# Altium PCB logi-cam.PcbDoc
Units mil, origin at the board's own origin, x right, y up, seen from the top; angles counter-clockwise.
Board outline 1771 x 996 mil, 2 copper layers (Top Layer, Bottom Layer); 37 components, 25 nets, 168 pads, 79 vias.
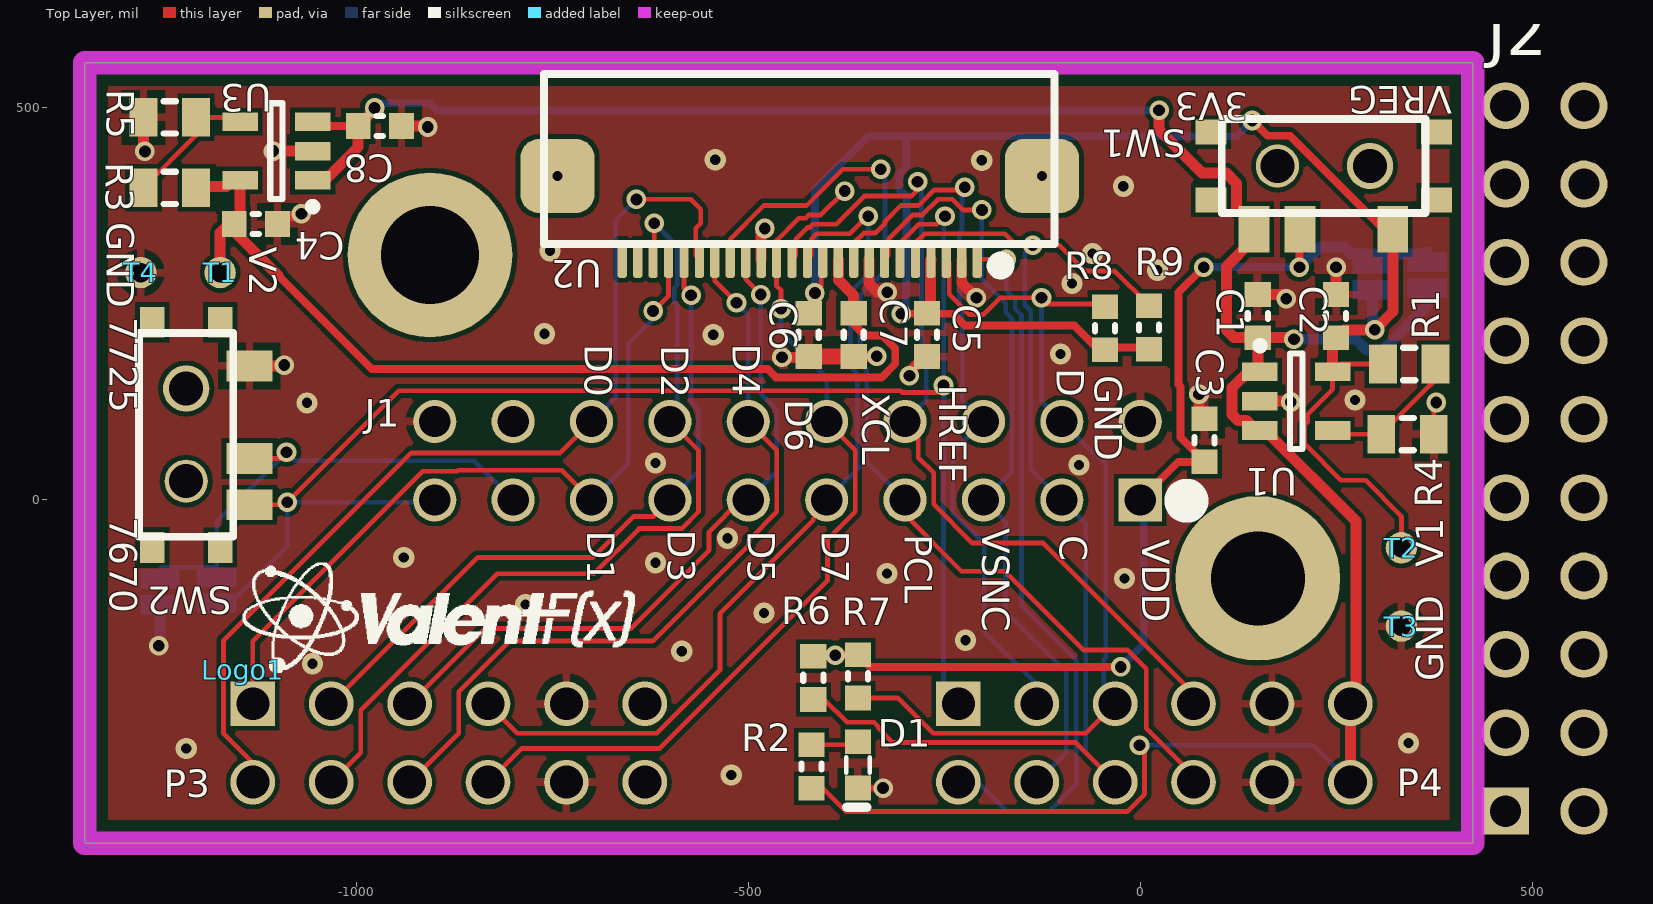
[diagram p0: Top Layer view]
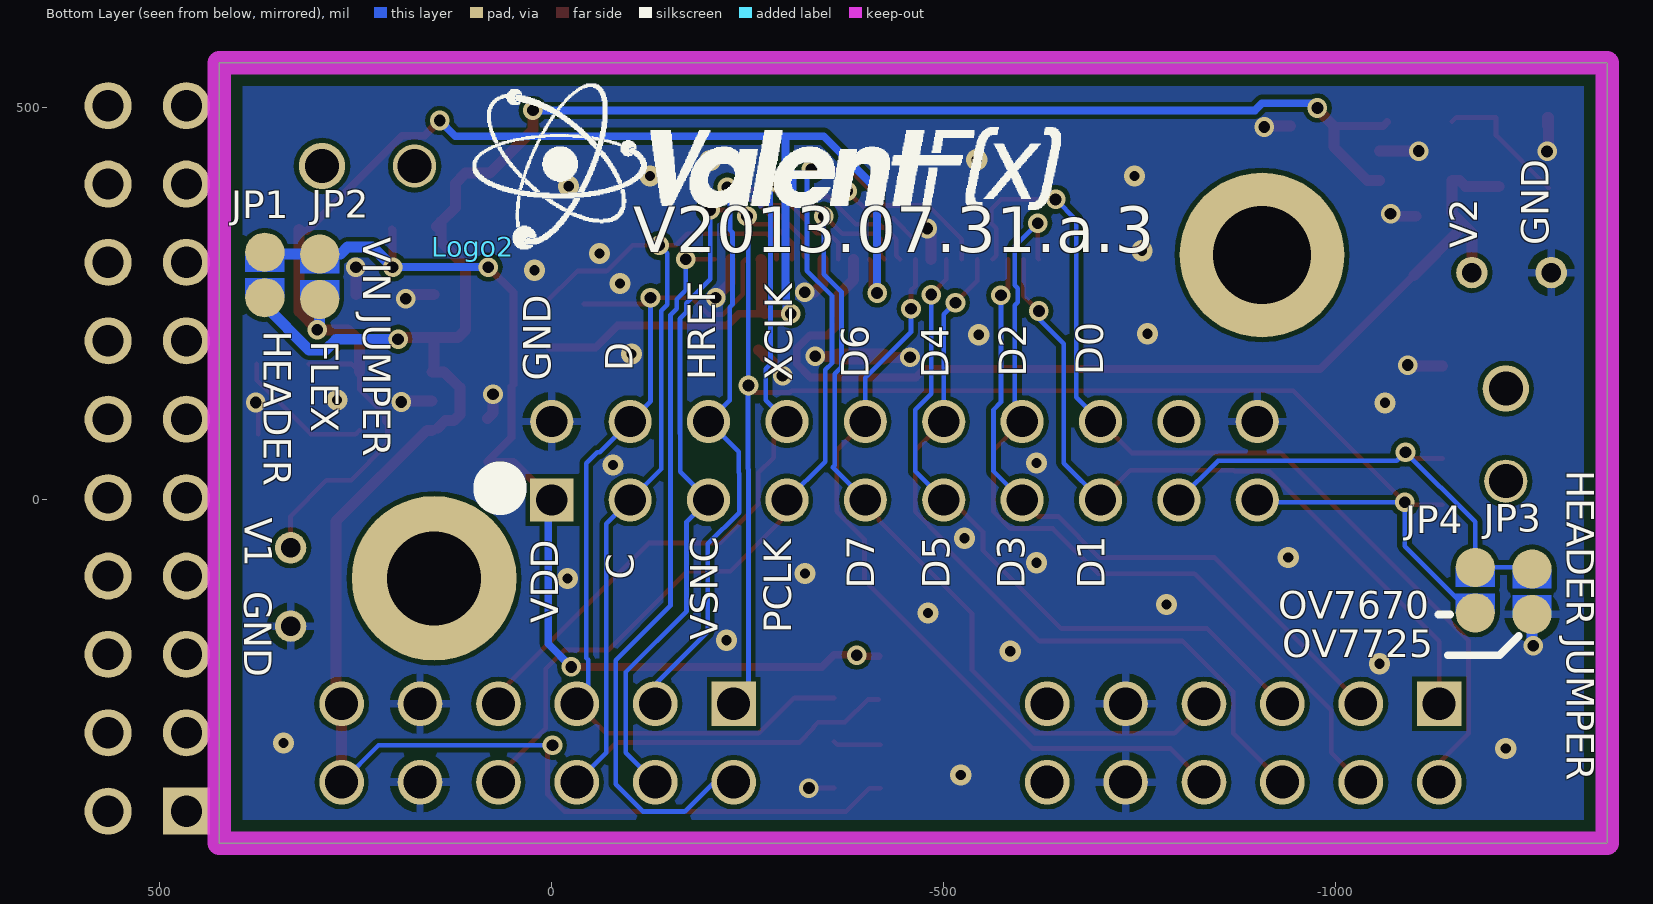
[diagram p1: Bottom Layer view, seen from below]
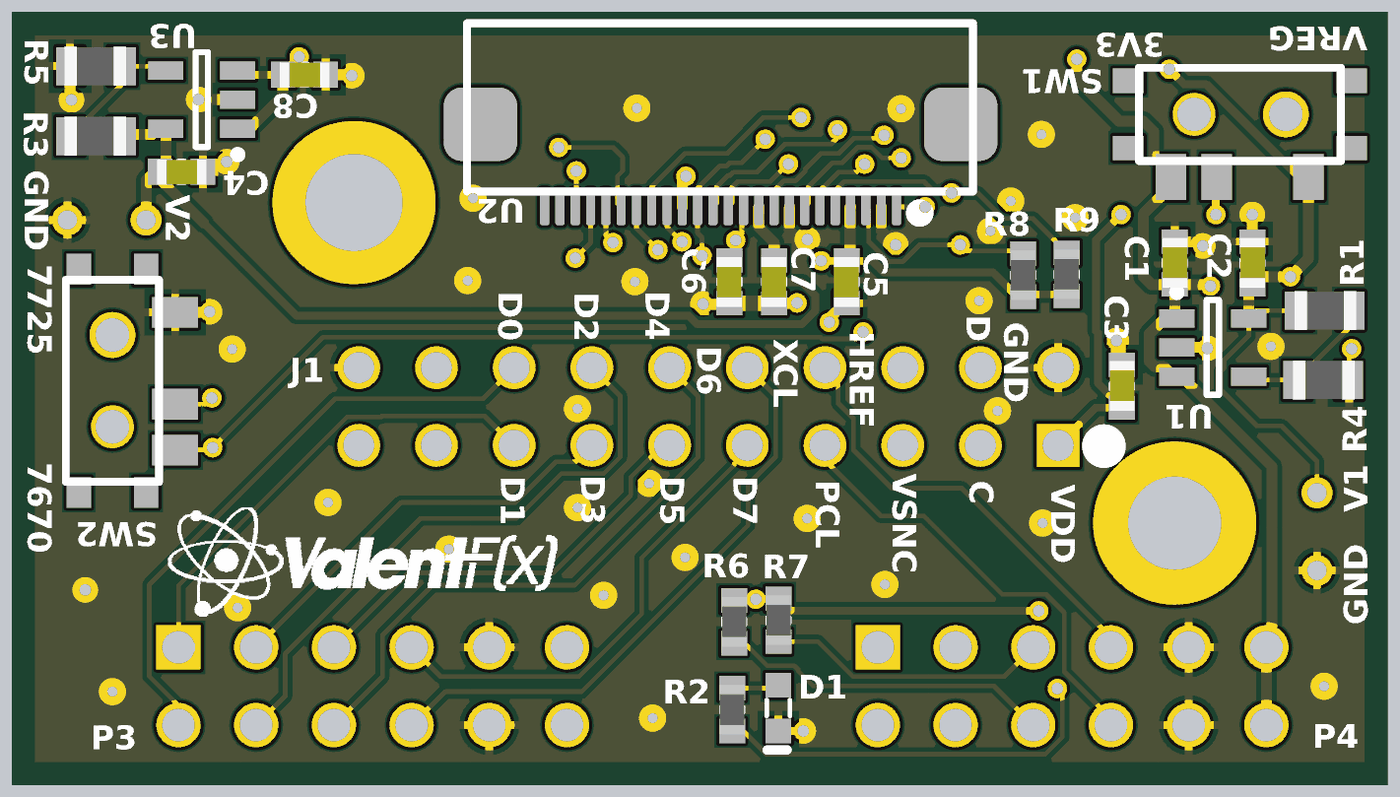
[diagram p2: 3D render of the assembled board from above, using the file's embedded part models]

## Layer stack, top to bottom
Top Layer: signal copper 1.4
Dielectric: core 12.6, FR-4, Dk 4.8
Bottom Layer: signal copper 1.4

## Board outline
-1346.69,-438 424.31,-438 424.31,558 -1346.69,558

## Design rules (kind name [scope] priority, off if disabled: settings)
Clearance Keepout [onlayer('keep-out layer')] p1: gap=15
Clearance POLY_IN_BGA [(WithinRoom('BGA_INNER'))] p2: gap=6
Clearance POLY_TO_POLY [inpoly vs inpoly] p3: gap=12
Clearance [All] p4: gap=6
FabricationTestPointUsage TestPointUsage [All] p1: valid=0 allowmultiple=FALSE
FabricationTestpoint Testpoint [All] p1: side=3 testpointundercomponent=TRUE minsize=40 maxsize=100 preferedsize=60 minholesize=0 maxholesize=40 preferedholesize=32 testpointgrid=1 allowsidetop=TRUE allowsidebottom=TRUE usegrid=TRUE gridtolerance=0.01
PlaneClearance [All] p1: clearance=10
PolygonConnect "via connect" [isvia] p1: connectstyle=Direct reliefconductorwidth=10 reliefentries=4 polygonreliefangle="90 Angle" airgapwidth=10
PolygonConnect [All] p2: connectstyle=Relief reliefconductorwidth=10 reliefentries=4 polygonreliefangle="90 Angle" airgapwidth=10
RoutingVias [All] p1: holewidth=15 width=25 viastyle="Through Hole" minholewidth=15 minwidth=25 maxholewidth=28 maxwidth=50
SilkToSolderMaskClearance SilkscreenOverComponentPads [IsPad] p1: minsilkscreentomaskgap=10 clearancetoexposedcopper=TRUE
SolderMaskExpansion VIA [isvia and not(locked)] p1: expansion=-100
SolderMaskExpansion SolderMaskExpansion_1 [All] p2: expansion=4
Width [All] p1: maxlimit=20 minlimit=6 preferedwidth=14
24 further rules are at their usual default settings.

## Components (designator, comment, footprint, x,y, rotation, side; value= is the part's Value field where it differs from the comment)
C1 "4.7uF" C0603 150,234.59 r90 top
C2 "4.7uF" C0603 249.86,234.59 r90 top
C3 ".1uF" C0603 82,76.19 r90 top
C4 "4.7uF" C0603 -1128.19,352 r0 top
C5 ".1uF" C0603 -272,210.56 r270 top
C6 ".1uF" C0603 -423,210.56 r270 top
C7 ".1uF" C0603 -365.48,210.56 r270 top
C8 "4.7uF" C0603 -970,477 r0 top
D1 "BLUE LED0603" "LED_0603 - BLUE" -360.07,-338 r270 top
J1 "CAM HEADER" "HEADER_10x2_40_100 1-3-5 THRU DIP"#1 0,0 r180 top locked
J2 "CAM HEADER" "HEADER_10x2_40_100 1-3-5 THRU DIP"#2 466,-397 r90 top
JP1 "Solder Jumper" SOLDER_JUMPER 366,258 r270 bottom
JP2 "Solder Jumper" SOLDER_JUMPER 296,255.72 r270 bottom
JP3 "Solder Jumper" SOLDER_JUMPER -1250.5,-146 r270 bottom
JP4 "Solder Jumper" SOLDER_JUMPER -1178,-144 r270 bottom
Logo1 "Valent Logo 500" ValentFX_500 -1144.86,-217 r0 top
Logo2 "Valent Logo 750" ValentFX_750 101,323 r180 bottom
P3 "MTSW-106-07-G-D-130-RA" "PMOD HEADER - Male" -1132,-260 r180 top
P4 "MTSW-106-07-G-D-130-RA" "PMOD HEADER - Male" -232,-260 r180 top
R1 "1.1Meg" R0805 343,173.41 r180 top
R2 "220" R0603 -419.46,-340 r90 top
R3 "500k" R0805 -1238,398 r0 top
R4 "1Meg" R0805 341,84 r180 top
R5 "1Meg" R0805 -1238,488 r0 top
R6 "4.7k" R0603 -417,-227 r270 top
R7 "4.7k" R0603 -360,-225 r270 top
R8 "4.7k" R0603 -45,219 r90 top
R9 "4.7k" R0603 11,220 r90 top
SW1 "SK-12C0405-SG 1.5 RT" "SW - SK-12C0405-SG 1.5 RT" 234,426 r180 top
SW2 "SK-12C0405-SG 1.5 RT" "SW - SK-12C0405-SG 1.5 RT" -1217,83 r270 top
T1 "Test Point" "Tp 25-40" -1173.69,290 r0 top
T2 "Test Point" "Tp 25-40" 333.13,-61 r0 top
T3 "Test Point" "Tp 25-40" 333.13,-161 r0 top
T4 "Test Point" "Tp 25-40" -1274.95,290 r0 top
U1 "TC1187VCT713" "SOT95P280X145-5N - TC2054" 199,126 r0 top
U2 "OV7670" OV7670 -208,307 r180 top locked
U3 "TC1187VCT713" "SOT95P280X145-5N - TC2054" -1102,445 r180 top

## Footprints (in the part's own frame and the unit in brackets; to place one, negate y for a bottom-side part, rotate by r counter-clockwise, add the part's x,y. Pads: shape width x height; smd on the part's side, far side on the other; paste and mask are expansions set on the pad)
C0603 [mm] "0603 Generic"
  rect 0.8x0.85 smd: 1(-0.7,0) 2(0.7,0)
  silkscreen extent -0.1,-0.33 0.1,0.33, body extent -0.8,-0.42 0.82,0.4, height 0.46
"HEADER_10x2_40_100 1-3-5 THRU DIP"#1 [mil]
  rect 55x55 hole 40: 1(0,0)
  round 55 hole 40: 2(0,-100) 3(100,0) 4(100,-100) 5(200,0) 6(200,-100) 7(300,0) 8(300,-100) 9(400,0) 10(400,-100) 11(500,0) 12(500,-100) 13(600,0) 14(600,-100) 15(700,0) 16(700,-100) 17(800,0) 18(800,-100) 19(900,0) 20(900,-100)
"HEADER_10x2_40_100 1-3-5 THRU DIP"#2 [mil]
  rect 60x60 hole 40: 1(0,0)
  round 60 hole 40: 2(0,-100) 3(100,0) 4(100,-100) 5(200,0) 6(200,-100) 7(300,0) 8(300,-100) 9(400,0) 10(400,-100) 11(500,0) 12(500,-100) 13(600,0) 14(600,-100) 15(700,0) 16(700,-100) 17(800,0) 18(800,-100) 19(900,0) 20(900,-100)
"LED_0603 - BLUE" [mm] "LED_0603 - BLUE"
  rect 0.8x0.85 smd: A(-0.75,0) C(0.75,0)
  silkscreen extent -0.25,-0.38 1.37,0.38, body extent -0.8,-0.4 0.8,0.4, height 0.75
OV7670 [mm]
  rrect50% 0.3x1.2 smd: 1(0,0) 2(0.5,0) 3(1,0) 4(1.5,0) 5(2,0) 6(2.5,0) 7(3,0) 8(3.5,0) 9(4,0) 10(4.5,0) 11(5,0) 12(5.5,0) 13(6,0) 14(6.5,0) 15(7,0) 16(7.5,0) 17(8,0) 18(8.5,0) 19(9,0) 20(9.5,0) 21(10,0) 22(10.5,0) 23(11,0) 24(11.5,0)
  rrect50% 2.4x2.4 smd: X(-2.1,-2.7) X(13.6,-2.7)
  silkscreen extent -2.5,-6 14.04,0.4
"PMOD HEADER - Male" [mil] "68021-212HLF"
  rect 57x57 hole 42: 1(0,0)
  round 57 hole 42: 2(-100,0) 3(-200,0) 4(-300,0) 5(-400,0) 6(-500,0) 7(0,100) 8(-100,100) 9(-200,100) 10(-300,100) 11(-400,100) 12(-500,100)
R0603 [mm] "0603 Generic"
  rect 0.8x0.85 smd: 1(-0.7,0) 2(0.7,0)
  silkscreen extent -0.1,-0.33 0.1,0.33, body extent -0.81,-0.41 0.81,0.41, height 0.46
R0805 [mm] "0805 Generic"
  rect 0.9x1.25 smd: 1(-0.85,0) 2(0.85,0)
  silkscreen extent -0.2,-0.53 0.2,0.53, body extent -1.04,-0.64 0.98,0.64, height 0.61
SOLDER_JUMPER [mil]
  round 50 smd: 1(0,0) 2(-58,0)
  Top Layer region: -32.92,-25.02 -57.92,-25.02 -57.92,24.98 -32.92,24.98
  Top Layer region: 0.08,-25.02 -24.92,-25.02 -24.92,24.98 0.08,24.98
"SOT95P280X145-5N - TC2054" [mm] "SOT23, 5-Leads, Body 3.1x3.1mm (max), Pitch 0.95mm, IPC Medium Density"
  rect 1.15x0.6 smd: 1(-1.175,0.95) 2(-1.175,0) 3(-1.175,-0.95) 4(1.175,-0.95) 5(1.175,0.95)
  silkscreen extent -1.3,-1.55 0.2,1.92, body extent -0.9,-1.55 0.9,1.55, height 1.45
"SW - SK-12C0405-SG 1.5 RT" [mm]
  rect 1x1.5 smd: 1(0.762,2.05) 2(2.262,2.05) 3(-2.238,2.05)
  rect 1x0.8 smd: x(-3.65,-1.1) x(-3.65,1.1) x(3.65,-1.1) x(3.65,1.1)
  round 1.5 hole 1.1: x(-1.5,0)
  round 1.4 hole 1.1: x(1.5,0)
  silkscreen extent -3.3,-1.52 3.3,1.52, body extent -3.3,-2.79 3.3,1.52, height 1.42
"Tp 25-40" [mil]
  round 40 hole 25: 1(0,0)
ValentFX_500 [mil]
  silkscreen extent 0,-3 500,137
ValentFX_750 [mil]
  silkscreen extent 0,-3 750,207

## Part data
C1 C2 C4 C8: library part "C0603 - GRM188F51A475ZE20D", "4.7uF 10volts Y5V +80-20% (MLCC) - SMD/SMT 0603"
C3 C5 C6 C7: library part "C0603 - C1608X7R1E104MT", ".10uF X7R 20% (MLCC) - SMD/SMT 0603 25volts"
D1: library part "LED0603 - HT-193NB-5589", "BLUE Standard LED - SMD Blue 470nm 40mcd 20mA"
J1 J2: library part "CAM - DUAL CAMERA HEADER_1", "CMOS CAMERA HEADER"
JP1 JP2 JP3 JP4: "Solder/Configuration Jumper"
P3 P4: library part "P-MOD - MTSW-106-07-G-D-130-RA", "Samtec Male Conn Unshrouded Header HDR 12 POS 2.54mm Solder RA Thru-Hole"
R1 R3 R4 R5: library part "R0603 - ERJ-3EKF1001V", "1Kohms 1% Thick Film Resistors - SMD 0603  Tol"
R2: library part "R0603 - ERJ-3EKF2200V", "220 - thick Film Resistors - SMD 0603 220ohms 1% Tol"
R6 R7 R8 R9: library part "R0603 - CRCW06034K70FKEA", "4.7k Thick Film Resistors - SMD 1/10watt 4.7Kohms 1%"
SW1 SW2: library part "SW - SK-12C0405-SG 1.5 RT", "Slide Switches SPDT 0.3 Amp at 4 V"
T1 T2 T3 T4: library part "Test Point 2", "Test Point Smaller Symbol"
U1 U3: library part "REG - TC1187VCT713", "IC REG LDO ADJ .15A SOT23A-5"
U2: "OV7670 - 24 PIN FFC"

## Free pads (board coordinates)
  round 210 hole 125: MT(-906,312.5)
  round 210 hole 120: MT(150,-100)

## Via types
v1: diameter 25, hole 15, Top Layer to Bottom Layer, 50 vias
v2: diameter 27, hole 13, Top Layer to Bottom Layer, 29 vias

## Nets (pads, with @x,y where several pads share a name; then routed paths per layer and width w, separated by ;. In a path a pad name is that pad's centre, name@x,y a point inside that pad or via, vN(x,y) a via of type N, cw(c..) or ccw(c..) an arc to the next point about the centre after c; other vN are vias at no path point)
1V8: C4.1 C7.1 R3.2 T1.1 U2.10 U3.5 | length 1298.1
  Top Layer w10: -1099.7,286.3 -980.41,167 -475.23,167 -464.49,156.25 -329.92,156.25 -312.5,173.67 -312.5,193.14 -329.11,209.75 -351.35,209.75 -365.48,223.87 C7.1
  Top Layer w14: R3.2@-1208.54,400 -1165.86,400 -1158.26,407.6 U3.5 -1148.26,366.3 -1173.69,340.87 T1.1 ; C4.1@-1157.56,344.15 -1099.7,286.3 ; U2.10 -385.17,280.5 -365.48,260.82 C7.1
3V3: C1.1 C8.1 JP1.1 P4.6 P4.12 R2.1 SW1.2 U1.1 U1.3 U3.1 U3.3 | length 3316.4
  Top Layer w6: R2.1 -405.25,-367.56 -375.31,-397.5 -16.47,-397.5 5.5,-375.53 5.5,-319.5 v1(-1,-313)
  Top Layer w10: U3.3@-1065.74,482.4 -1060.34,477 C8.1
  Top Layer w14: U3.1 -1040.31,407.6 -997.56,450.35 C8.1 -976.69,497.87 v1(-976.69,500) ; v1(24,497) 24,472 79,417 109.81,417 122.98,403.83 122.98,373.02 SW1.2@141,355 ; U1.3@145,92 135.81,101.19 124.72,101.19 117.1,108.8 117.1,143.2 137.31,163.4 U1.1 150,166.14 C1.1 ; SW1.2@147,349 SW1.2@141,355 ; U1.3 159.4,88.6 275,-27 275,-253 P4.6 P4.12@268,-335 ; v1(196,205) 193.96,207.04 C1.1 ; SW1.2@141,355 141,329 109.81,297.81 109.81,217 119.77,207.04 C1.1
  Bottom Layer w6: v1(-1,-313) 221,-313 P4.12
  Bottom Layer w10: v1@-976.69,506 -906,506 -897,497 v1(24,497)
  Bottom Layer w14: v1(196,205) 274.94,205 288.44,191.5 309.56,191.5 366,247.94 JP1.1
CTL_CLK: J1.3 P4.9 R6.2 R9.2 U2.5 | length 1526.3
  Top Layer w6: R6.2 -403.21,-254.56 -374.04,-283.72 -339.61,-283.72 -334.34,-289 -334.34,-290.66 -315.5,-309.5 -82.5,-309.5 P4.9 ; U2.5 -286.74,327.84 -274.96,339.62 -172.74,339.62 -157.91,324.79 v1(-137.16,324.79) -103.16,324.79 -70.32,291.95 -32.39,291.95 R9.2@10,249.56
  Bottom Layer w6: v1(-137.16,324.79) -147.5,314.45 -147.5,249.09 -139.5,241.09 -139.5,39.5 J1.3 -69.5,-30.5 -69.5,-322.5 P4.9
CTL_DATA: J1.4 P4.3 R7.2 R8.2 U2.3 | length 1194.7
  Top Layer w6: R7.2 -309.17,-252.56 -264.23,-297.5 -69.5,-297.5 P4.3 ; U2.3 -243.69,303.31 -243.69,262.28 -217.91,236.5 -200.09,236.5 -178.59,258 v1(-126,258) -118.06,250.06 R8.2@-41,250.06
  Bottom Layer w6: v1(-126,258) -126,126 J1.4 -61,61 -58,61 -44,47 -44,-201.59 -46.5,-204.09 -46.5,-245.5 P4.3
D0: J1.16 P3.7 U2.19 | length 1219.4
  Top Layer w6: P3.7@-1132,-335 -1169.5,-297.5 -1169.5,-179.5 -930,60 -740,60 J1.16 ; v1(-642.69,383.41) -573.11,383.41 -560.52,370.81 -560.52,353 -567.11,346.41 -567.11,311.78 U2.19
  Bottom Layer w6: J1.16 -669,131 -669,357.1 v1(-642.69,383.41)
D1: J1.15 P3.1 U2.21 | length 965.4
  Top Layer w6: P3.1 -1132,-180.38 -915.12,36.5 -871.38,36.5 -870,37.88 -737.88,37.88 J1.15 ; v1(-621.39,241) -601.7,260.69 U2.21
  Bottom Layer w6: J1.15 -652.99,47.01 -652.99,199.42 -621.39,231.02 v1(-621.39,241)
D2: J1.14 P3.8 U2.22 | length 1092.7
  Top Layer w6: P3.8 -994.5,-322.5 -994.5,-268.13 -820.37,-94 -696.86,-94 -639.36,-36.5 -584.88,-36.5 -563.5,-15.12 -563.5,63.5 J1.14 ; U2.22 -620,308.39 v1(-620,353.09)
  Bottom Layer w6: v1(-620,353.09) -590.5,323.59 -590.5,273.91 -594.5,269.91 -594.5,252.09 -590.5,248.09 -590.5,109.5 J1.14
D3: J1.13 P3.2 U2.20 | length 869.5
  Top Layer w6: P3.2 -845.5,-73.5 -698.43,-73.5 -645.93,-21 -621,-21 J1.13 ; U2.20 -582.02,270.02 v1(-573,261)
  Bottom Layer w6: J1.13 -563.5,36.5 -563.5,115.12 -573,124.62 v1(-573,261)
D4: J1.12 P3.9 U2.18 | length 1001.1
  Top Layer w6: P3.9 -869.5,-297.5 -869.5,-244.47 -805.03,-180 -622,-180 -499,-57 -499,-50.62 -463.5,-15.12 -463.5,63.5 J1.12 ; U2.18 -542.65,279.36 v1(-515,251.72)
  Bottom Layer w6: v1(-515,251.72) -500,236.72 J1.12
D5: J1.11 P3.3 U2.16 | length 897.2
  Top Layer w6: P3.3 -836,-164 -650,-164 -550,-64 -550,-40.69 -509.31,0 J1.11 ; U2.16 -503.28,281.28 v1(-484,262) ; U2.16@-503.28,323.72 U2.16@-499.59,327.41
  Bottom Layer w6: J1.11 -463.5,36.5 -463.5,115.12 -484,135.62 v1(-484,262)
D6: J1.10 P3.10 U2.14 | length 1128.4
  Top Layer w6: P3.10 -788.97,-316.97 -612.97,-316.97 -399,-103 -399,-50.62 -363.5,-15.12 -363.5,63.5 J1.10 ; U2.14 -463.91,272.91 -458.23,267.23 v1(-458.23,243.93) ; -463.91,330.98 -435.39,359.5 -426.82,359.5 -422.7,363.62 -407.38,363.62 v1(-377,394) -376.38,394 v1@-370,387.62
  Bottom Layer w6: v1(-458.23,243.93) -458.23,214.23 -400,156 J1.10
D7: J1.9 P3.4 U2.12 | length 1095.8
  Top Layer w6: P3.4 -794.5,-297.5 -616.47,-297.5 -536.14,-217.17 -536.14,-145 -417,-25.86 -417,-24 ; U2.12 -419.76,311.78 -419.76,332.62 -412.75,339.62 -370.67,339.62 -348.29,362 v1(-347,362) v1@-347,359
  Bottom Layer w6: J1.9 -358.49,41.51 -360.96,43.99 -360.96,160.99 -369.5,169.53 -369.5,265.43 -347,287.93 v1(-347,362)
FLEX_STRB: P4.7 U2.1 | length 934.5
  Top Layer w6: U2.1 v1(-171,307)
  Bottom Layer w6: P4.7@-232,-335 -169.5,-397.5 -116.47,-397.5 -81.5,-362.53 -81.5,-204.5 -151.5,-134.5 -151.5,236.12 -159.5,244.12 -159.5,255.88 -171,267.38 v1(-171,307)
GND: C1.2 C2.2 C3.2 C4.2 C5.2 C6.2 C7.2 C8.2 D1.C J1.2 J1.20 JP3.1 P3.5 P3.11 P4.5 P4.11 R4.1 R5.1 SW2.3 T3.1 T4.1 U1.2 U2.2 U2.8 U2.15 U3.2 | length 808
  Top Layer w6: D1.C v1@-328.05,-367.53 ; R4.1 374.46,121.07 v1(377.7,124.31)
  Top Layer w14: R5.1 -1271.46,446.43 v1(-1269.69,444.65) ; R5.1@-1270.46,478 R5.1@-1270.46,488 ; SW2.3 -1092.89,171.11 v1(-1092,172) ; v1(-1106,445) U3.2 ; C4.2@-1102.44,361.91 -1073.09,361.91 v1(-1070,365) ; C8.2 -910.23,477 v1(-909,475.77) ; U2.15 -483.59,341.7 v1(-479,346.29) ; v1(-457,182) -456.44,181.44 C6.2@-424,181.44 ; C7.2@-368,184.44 -366.56,183 C7.2@-366.02,182.46 ; C7.2 -336.4,183 v1(-336,183.4) ; U2.8 -345.8,276 -334.68,264.88 v1(-322.68,264.88) ; v1(-294.47,158.47) -297,161 -275.56,182.44 C5.2@-273,182.44 ; C5.2@-272,182.44 C5.2@-273,182.44 ; C5.2@-264,191.44 C5.2@-273,182.44 ; U2.2 -227.69,276.69 v1(-209,258) ; v1(75,134.8) 75,110.75 C3.2 ; C1.2 180.61,262.15 v1(186.17,256.59) ; U1.2 191,126 v1(192,125) ; C2.2 v1(249.86,297)
  Top Layer w20: C6.2 -366.56,183 C7.2
  Bottom Layer w14: v1(-1252,-186) -1250.5,-184.5 JP3.1
  other v1: -328.02,-367.56
  other v2: -521.82,-350.99 -1217,-316.97 342.3,-310 -1055.86,-209 -584.88,-193 -222.99,-179.01 -480.08,-144.2 -784.11,-133.5 -20,-100 -323,-94 -618.49,-80.04 -939.56,-73.5 -526.36,-48.86 -78,44.49 -618.49,47.2 -1062.86,123.89 273.9,127.43 -101.7,186.14 -544.62,210.72 -759.86,212.09 -87,276 21.88,293 -61,314.45 -753,318 -21.57,400.19 -743.42,413.3 -125.32,413.3 -202.2,433.23 -542.11,434
HREF: J1.6 P4.2 U2.9 | length 928
  Top Layer w6: U2.9 -365.48,327.84 -352.82,340.5 -338.09,340.5 -325.5,353.09 -325.5,355.53 -305.41,375.62 -282.75,375.62 -262.88,395.5 -227.5,395.5 v1(-224,399)
  Bottom Layer w6: v1(-224,399) -227.5,395.5 -227.5,344.09 -230.5,341.09 -230.5,249.09 -227,245.59 -227,127 J1.6 -238.4,61.6 -238.4,34.81 -239,34.21 -239,-16.15 -199,-56.15 -199,-168 -132,-235 P4.2
NetD1_A: D1.A R2.2 | length 61
  Top Layer w6: R2.2 -364.04,-312.44 D1.A
NetJ1_17: J1.17 JP3.2 JP4.2 SW2.1 | length 622.1
  Top Layer w6: SW2.1 -1097,53 v1(-1089,61)
  Bottom Layer w6: JP3.2 -1248.5,-86 JP4.2 -1178,-28 v1(-1089,61) -1078,50 -850,50 J1.17
NetR1_1: R1.1 R4.2 U1.4 | length 182.5
  Top Layer w6: U1.4 249.86,84 R4.2 307.54,84.55 368.8,145.81 369.34,145.81 376.46,152.93 R1.1
NetR3_1: R3.1 R5.2 U3.4 | length 176.3
  Top Layer w6: R3.1 -1204.54,464.93 R5.2 -1153.86,488 U3.4
PCLK: J1.7 P4.10 U2.17 | length 1293.9
  Top Layer w6: U2.17 -522.96,332.74 -480.07,375.62 -425.38,375.62 -398.5,402.5 -398.5,402.91 -379.41,422 v1(-331,422) ; J1.7 -300,-19 -228,-91 -172.68,-91 -72.18,-191.5 -16.09,-191.5 7.76,-215.36 7.76,-291.36 68,-351.59 P4.10
  Bottom Layer w6: v1(-331,422) -325.5,416.5 -325.5,292.46 -357.5,260.46 -357.5,174.5 -348.96,165.96 -348.96,48.96 J1.7
RST_OV7670: J1.19 JP4.1 P4.1 SW2.2 U2.6 | length 2045
  Top Layer w6: SW2.2 -1091.06,-6.06 v1(-1088,-3) -945.8,139.2 -305.61,139.2 -303.37,136.97 -260.03,136.97 v1(-251,146) ; U2.6 -306.43,327.84 -282.64,351.62 -259.38,351.62 v1(-249,362)
  Bottom Layer w6: JP4.1 -1173.2,-144 -1088,-58.8 v1(-1088,-3) -903,-3 J1.19 ; v1(-251,146) v1@-250,146 ; v1(-249,362) -250.5,360.5 -250.5,146.5 v1@-250,146 ; P4.1 -251,-241 -251,39.18 -250.4,39.78 -250.4,145.6 v1@-250,146
VCAM: C3.1 J1.1 JP1.2 JP2.2 R6.1 R7.1 SW1.1 | length 1354
  Top Layer w10: R6.1 -390.44,-199.44 v1(-389,-198) -388.44,-197.44 R7.1 -344.44,-213 v1(-25,-213) ; J1.1 48.63,48.63 C3.1 82,49.27 51.5,79.77 51.5,144.53 48.63,147.4 48.63,264.63 v1(81,297) ; v1(203,297) 203,344.29 SW1.1
  Bottom Layer w10: v1(-25,-213) 4.5,-183.5 4.5,-4.5 J1.1 ; v1(81,297) v1(203,297) ; JP1.2@366,316.15 JP1.2@367,316.15
  Bottom Layer w14: v1(203,297) 228.5,322.5 260.42,322.5 269.2,313.72 JP2.2 363.72,313.72 JP1.2
VREG: C2.1 C5.1 C6.1 JP2.1 R1.2 R8.1 R9.1 SW1.3 T2.1 U1.5 U2.4 U2.11 | length 2305.7
  Top Layer w6: v1(-415,264) -407,272 -407,304.85 U2.11 ; R1.2 255.26,173.41 U1.5 245.26,141.05 213.62,109.41 213.62,100 209.62,96 209.62,71.4 256.02,25 287.48,25 333.13,-20.65 ; T2.1 333.13,-22.65
  Top Layer w10: v1(-305,237.56) C5.1@-272,237.56 ; C5.1@-271.72,237.84 C5.1@-272,237.56 ; R9.1@3,194.44 -56,194.44 -84.06,222.5 -223.7,222.5 -238.76,237.56 C5.1@-272,237.56 ; v1(143,484) 162.44,464.56 190.92,464.56 312.48,343 SW1.3@320,343
  Top Layer w14: C5.1 -267.83,242.28 -267.83,306.22 U2.4 ; U1.5 C2.1@245.26,200.74 ; C2.1 259.82,217 v1(299,217) 322.11,240.11 SW1.3
  Bottom Layer w10: v1(-415,264) -415,396 -347,464 -301.65,464 ; v1(-305,237.56) -299.18,243.38 -299.18,276.35 -298.1,277.43 ; -298.1,260.1 -298.1,277.43 ; v1(143,484) 123,464 -301.65,464 ; -301.65,464 -298.1,460.45 -298.1,425.14 -307.5,415.73 -307.5,396.27 -298.1,386.86 -298.1,277.43
  Bottom Layer w14: JP2.1 296,220 v1(299,217)
VSYNC: J1.5 P4.8 U2.7 | length 993.9
  Top Layer w6: U2.7 -321.33,311.78 -321.33,332.62 -290.33,363.62 -277.78,363.62 -257.91,383.5 -240.09,383.5 -226.59,370 v1(-202,370)
  Bottom Layer w6: v1(-202,370) -202,281.41 -171.5,250.91 -171.5,239.15 -163.5,231.15 -163.5,84.88 -164,84.38 -164,36 J1.5 -172,-28 -172,-141.97 -94.5,-219.47 -94.5,-322.5 P4.8
XCLK: J1.8 P4.4 U2.13 | length 1081.3
  Top Layer w6: U2.13 -439.44,311.78 -439.44,332.62 -424.56,347.5 -421.85,347.5 -417.72,351.62 -387.78,351.62 -351.78,387.62 -292.38,387.62 -279,401 v1(-284,406) ; -283,78 -283,54.12 -263.5,34.62 -263.5,-5.5 -214,-55 -124,-55 68,-247 P4.4
  Bottom Layer w6: J1.8 -272.97,127.03 -272.97,167.37 -279,173.41 -279,401 v1(-284,406)
pads on no net: J1.18 J2.1 J2.2 J2.3 J2.4 J2.5 J2.6 J2.7 J2.8 J2.9 J2.10 J2.11 J2.12 J2.13 J2.14 J2.15 J2.16 J2.17 J2.18 J2.19 J2.20 P3.6 P3.12 SW1.x SW2.x U2.23 U2.24 U2.X

## Polygon pours and split planes (outlines as drawn)
GND on Bottom Layer "GND_BOT" (solid, pour order 6): -1332,-428 -1332,540 418,540 418,-428
GND on Top Layer "GND_TOP" (solid, remove dead copper, pour order 5): -1322.05,-481.8 -1322.05,543.2 427.95,543.2 427.95,-481.8

## Keep-outs
Keep-Out Layer:
  the board outline again, w30

## Silkscreen, mask and mechanical layers (free items; w line width, h text height)
Top Overlay:
  circle w40: c58.94,-1 r8.06
  text "VREG" at 398,539 h60 r180
  text "3V3" at 137.5,531 h60 r180
  text "GND" at -1330,354.49 h60 r270
  text "V2" at -1148.26,322.74 h60 r270
  text "7725" at -1326,233 h60 r270
  text "D4" at -531,199 h60 r270
  text "D0" at -720.34,198.39 h60 r270
  text "D2" at -622.34,197.39 h60 r270
  text "D" at -118,168 h60 r270
  text "GND" at -69.5,159 h60 r270
  text "HREF" at -268,147 h60 r270
  text "XCL" at -366,137 h60 r270
  text "D6" at -464.49,128.26 h60 r270
  text "7670" at -1326,-22.02 h60 r270
  text "VSNC" at -213,-36 h60 r270
  text "D3" at -614,-38 h60 r270
  text "D1" at -717,-39 h60 r270
  text "D5" at -512,-39 h60 r270
  text "D7" at -418,-39 h60 r270
  text "PCL" at -312,-44 h60 r270
  text "C" at -114,-45 h60 r270
  text "VDD" at -9,-50 h60 r270
  text "V1" at 398,-86 h60 r90
  text "GND" at 398,-231 h60 r90
Bottom Overlay:
  circle w60: c66,15 r4.12
  lines w10: -1233.5,-173.5 -1209,-198 -1143,-198 ; -1146,-146 -1131,-146
  text "VIN JUMPER" at 252,335 h60 r90
  text "GND" at -1283,325 h60 r270
  text "V2" at -1192,321 h60 r270
  text "V2013.07.31.a.3" at -104,297 h100
  text "HEADER" at 379,216 h60 r90
  text "FLEX" at 318,203 h60 r90
  text "D" at -115,164 h60 r270
  text "D0" at -715,159 h60 r270
  text "D2" at -617,157 h60 r270
  text "D4" at -518,155 h60 r270
  text "D6" at -416,155 h60 r270
  text "HREF" at -220,153 h60 r270
  text "XCLK" at -318,152 h60 r270
  text "GND" at -10,152 h60 r270
  text "HEADER JUMPER" at -1283,38 h60 r90
  text "V1" at 403,-23 h60 r90
  text "C" at -116,-102 h60 r270
  text "D1" at -717,-113 h60 r270
  text "D3" at -615,-113 h60 r270
  text "D5" at -519,-113 h60 r270
  text "D7" at -423,-113 h60 r270
  text "GND" at 403.74,-116.31 h60 r90
  text "VDD" at -20,-157 h60 r270
  text "OV7670" at -927,-163 h60
  text "PCLK" at -317,-170 h60 r270
  text "VSNC" at -222.99,-179.01 h60 r270
  text "OV7725" at -932,-212 h60
Mechanical 2:
  lines w10: -1950,-370 -1930,-430 ; -1950,3510 -1930,3570 ; -1940,-430 -1920,-430 ; -1940,3570 -1920,3570 ; -1930,1289.09 -1930,-430 ; -1930,1850.91 -1930,3570 ; -1910,-370 -1930,-430 ; -1910,3510 -1930,3570 ; -1430,-840 -1430,-820 ; -1370,-850 -1430,-830 ; -1370,-810 -1430,-830 ; 789.09,-830 -1430,-830 ; 1350.91,-830 3570,-830 ; 3510,-850 3570,-830 ; 3510,-810 3570,-830 ; 3570,-840 3570,-820
  text "4000 (mil)" at -1894.01,1299.09 h60 r90
  text "5000 (mil)" at 799.09,-865.99 h60
Mechanical 3:
  text "Specs" at 5070.89,2882.78 h60
  text "http://www.4pcb.com/index.php?load=content&page_id=131" at 5070.89,2782.78 h60
  text "Line/Space:" at 5070,2670 h60
  text "6 mil" at 6170,2670 h60
  text "Min Hole:" at 5070,2570 h60
  text "15 mil" at 6170,2570 h60
  text "Annular Ring Via:" at 5070,2470 h60
  text "10 mil" at 6170,2470 h60
  text "Annular Ring Comp Hole:" at 5070,2370 h60
  text "15 mil" at 6470,2370 h60
  text "Layers:" at 5070,2270 h60
  text "4" at 6170,2270 h60
  text "Copper:" at 5070,2170 h60
  text "1oz" at 6170,2170 h60
  text "Lead:" at 5070,2070 h60
  text "Lead Free" at 6170,2070 h60
  text "Plating:" at 5070,1970 h60
  text "Plated" at 6170,1970 h60
  text "Silkscreen:" at 5070,1870 h60
  text "Top / Bottom" at 6170,1870 h60
  text "Solder Mask:" at 5070,1770 h60
  text "Top Bottom - Green" at 6170,1770 h60
  text "Scoring - Tab:" at 5070,1670 h60
  text "None" at 6170,1670 h60
  text "Max Size:" at 5070,1570 h60
  text "30 in^2" at 6170,1570 h60
  text "Revisions" at 5070.89,982.78 h60
  text "1" at 5070.89,885.14 h60
  text "- Adding- ADC components to the top layer" at 5344,872 h60
  text "- Moving the touch signals to bottom layer" at 5344,772 h60
  text "Notes" at 5070,-130 h60
Mechanical 16:
  lines w5: -6230,-1755 -6030,-1755 ; -6230,1020 -6030,1020 ; -6230,3795 -6030,3795 ; -4290,-4530 -4290,-4330 ; -4290,6370 -4290,6570 ; -2355,-4530 -2355,-4330 ; -2355,6370 -2355,6570 ; -420,-4530 -420,-4330 ; -420,6370 -420,6570 ; 1520,-4530 1520,-4330 ; 1520,6370 1520,6570 ; 3455,-4530 3455,-4330 ; 3455,6370 3455,6570 ; 4570,-4030 9070,-4030 ; 4570,-3730 9070,-3730 ; 5390,-4530 5390,-4330 ; 5390,6370 5390,6570 ; 6070,-4330 6070,-3730 6070,-3430 4570,-3430 4570,-4330 ; 7330,-4530 7330,-4330 ; 7330,6370 7330,6570 ; 8170,-4330 8170,-3730 ; 9070,-3430 3170,-3430 3170,-4330 4570,-4330 ; 9070,-3130 9070,-4330 ; 9070,-1755 9270,-1755 ; 9070,1020 9270,1020 ; 9070,3795 9270,3795 ; 4570,-4330 9070,-4330 ; 9070,-4330 -6030,-4330 -6030,6370 9070,6370 9070,-4330 ; -6230,-4530 -6230,6570 9270,6570 9270,-4530 -6230,-4530
  text "1" at -5283.66,6435 h60
  text "2" at -3353,6435 h60
  text "3" at -1413.66,6435 h60
  text "4" at 527,6435 h60
  text "5" at 2467,6435 h60
  text "6" at 4397,6435 h60
  text "7" at 6347,6435 h60
  text "8" at 8277,6435 h60
  text "A" at -6155,5097 h60
  text "A" at 9145,5097 h60
  text "B" at -6155,2317 h60
  text "B" at 9145,2317 h60
  text "C" at -6155,-463 h60
  text "C" at 9145,-463 h60
  text "D" at -6155,-3223 h60
  text "D" at 9145,-3223 h60
  text "PCB DESIGNER:" at 4620,-3525 h60
  text "TITLE:" at 6170,-3530 h60
  text "Michael Jones" at 4685,-3660 h60
  text "Group VIII Technology" at 3410,-3760 h60
  text "DATE:" at 4620,-3830 h60
  text "PART NO.:" at 6120,-3830 h60
  text "REV:" at 8220,-3830 h60
  text "1652 W 820 N" at 3410,-3860 h60
  text ".PRINT_DATE" at 4670,-3950 h60
  text "Provo, UT 84601" at 3410,-3960 h60
  text "801/379-0118" at 3410,-4060 h60
  text "FILE NAME:" at 4620,-4130 h60
  text "DWG NO:" at 6120,-4130 h60
  text "SCALE:" at 8220,-4130 h60
  text ".PCB_FILE_NAME_NO_PATH" at 4670,-4250 h60
  text "1" at -5283.66,-4465 h60
  text "2" at -3353,-4465 h60
  text "3" at -1413.66,-4465 h60
  text "4" at 527,-4465 h60
  text "5" at 2467,-4465 h60
  text "6" at 4397,-4465 h60
  text "7" at 6347,-4465 h60
  text "8" at 8277,-4465 h60